# EAGLE board test_simple (EAGLE 7.7.0)
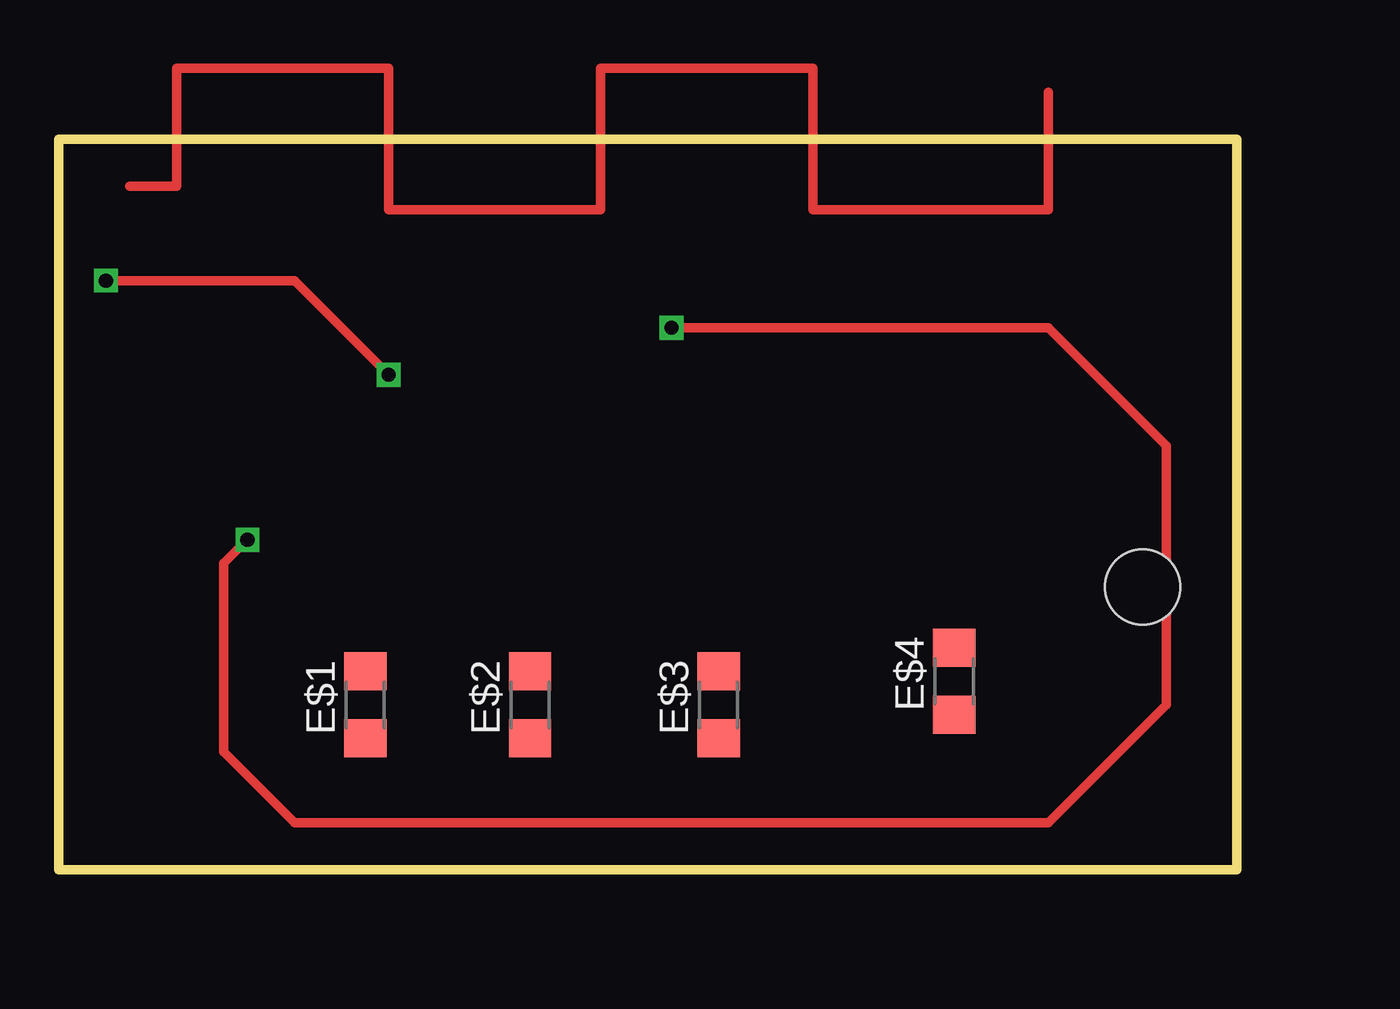
[diagram p0: board, top side]
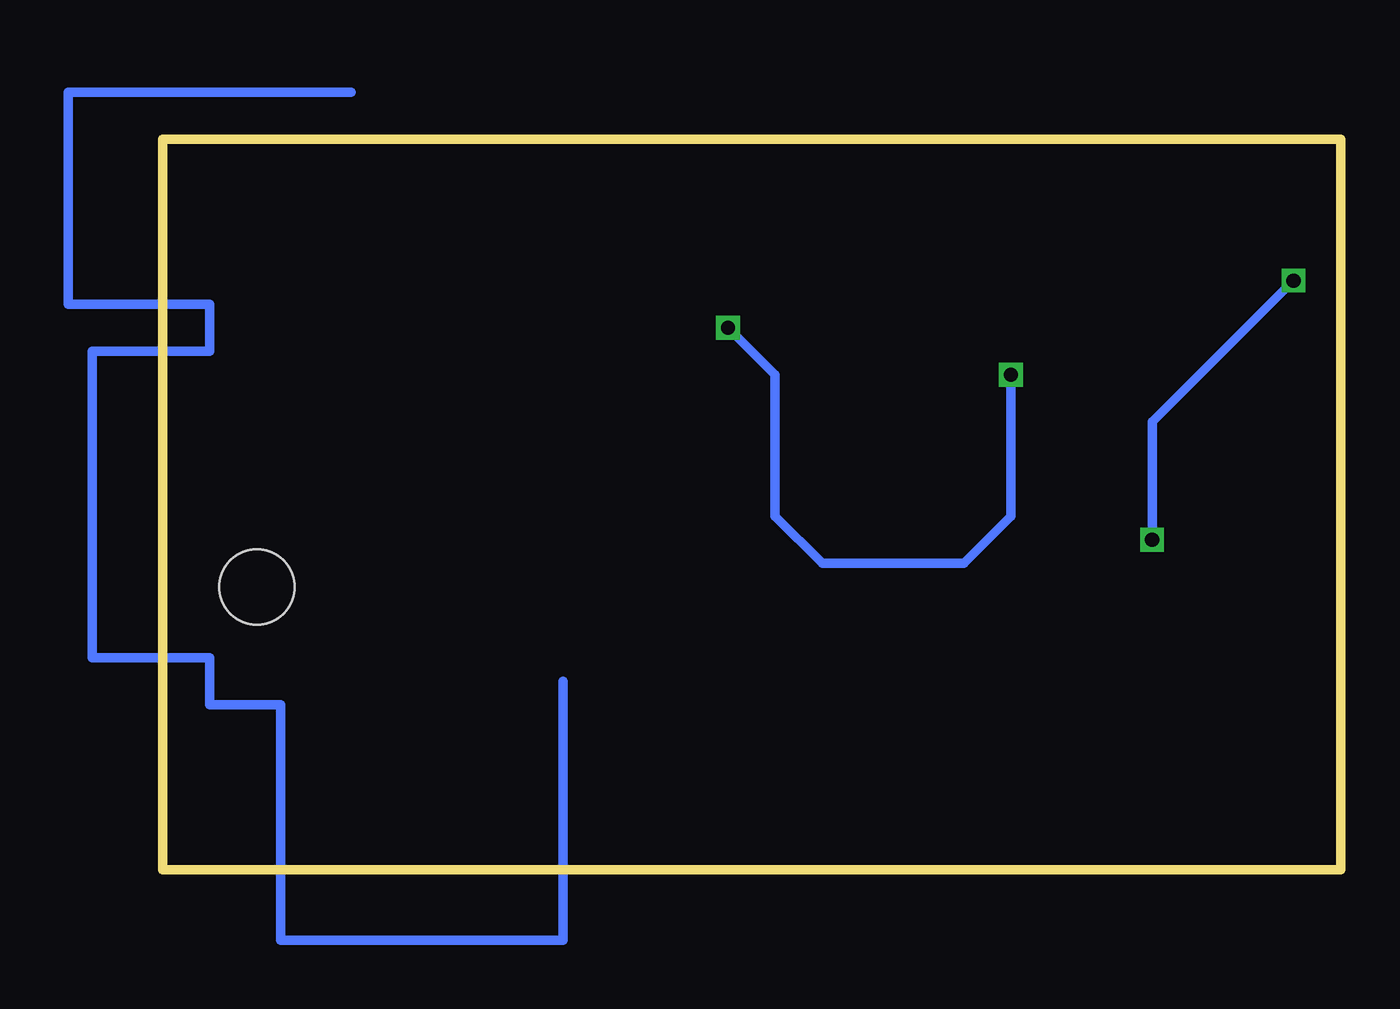
[diagram p1: board, bottom side, seen from below]

Size 50 x 31 mm. Coordinates in mm from the lower left corner, seen from the top.
Outline: 0,0 50,0 50,31 0,31 0,0
Copper layers (1*16): Top 0.035mm / dielectric 1.5mm / Bottom 0.035mm
Design rules "default": minimum track width 10mil, minimum drill 24mil, track to track 8mil, track to pad 8mil, pad to pad 8mil, via to via 8mil, smd to smd 8mil, copper to edge 40mil, drill to drill 8mil, minimum pad ring 10mil, minimum via ring 8mil, stop-mask expansion 4mil, vias tented up to drill 0mil, thermal gap 10mil
Holes 3.2 mm at 46,12

## Footprints (pad centres in the part's own frame; a part is rotated, then mirrored left to right if it is on the bottom)
R1206 = smd 1.6 x 1.803: 1 -1.422,0; 2 1.422,0

## Placement (x,y rotation side)
E$1  [R1206]  13,7 90 top
E$2  [R1206]  20,7 90 top
E$3  [R1206]  28,7 90 top
E$4  [R1206]  38,8 90 top

## Library data of the parts
E$1-E$4 = rcl

## Tracks (layer width: path | path; a pad name or v marks a point on that pad's centre or on a via)
S$1  (via drill 0.6)
  Top 0.406: v2,25 10,25 v14,21 | v26,23 42,23 47,18 47,7 42,2 10,2 7,5 7,13 v8,14
  Bottom 0.406: v8,14 8,19 v2,25 | v14,21 14,15 16,13 22,13 24,15 24,21 v26,23
S$2
  Top 0.406: 3,29 5,29 5,34 14,34 14,28 23,28 23,34 32,34 32,28 42,28 42,33
S$3
  Bottom 0.406: 42,33 54,33 54,24 48,24 48,22 53,22 53,9 48,9 48,7 45,7 45,-3 33,-3 33,8